# EAGLE board Tube_board_v2 (EAGLE 6.5.0)
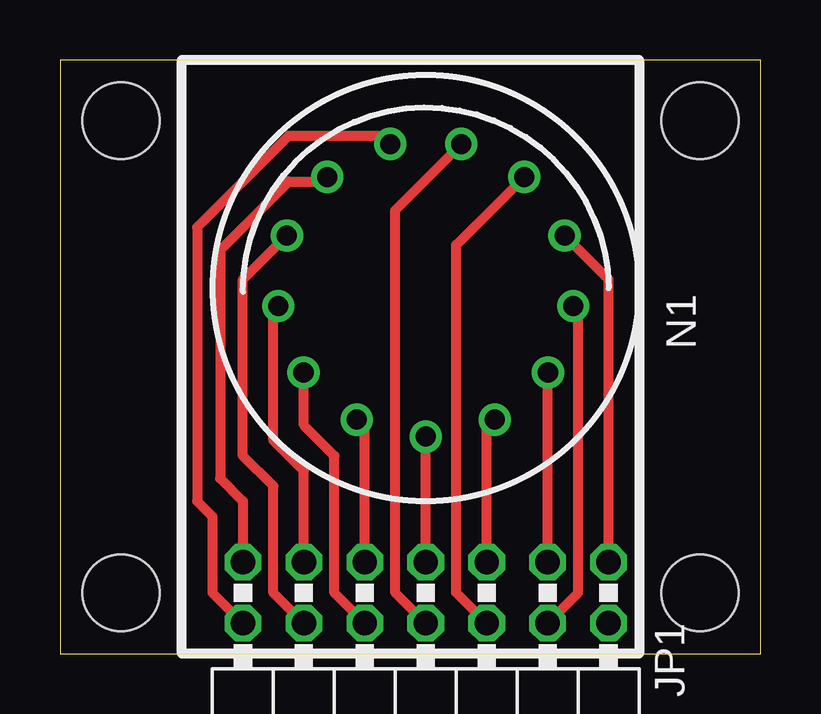
[diagram p0: board, top side]

Size 29.2 x 24.75 mm. Coordinates in mm from the lower left corner, seen from the top.
Outline: 0,0 29.2,0 29.2,24.75 0,24.75 0,0
Copper layers (1*16): Top 0.035mm / dielectric 1.5mm / Bottom 0.035mm
Design rules "default": minimum track width 10mil, minimum drill 24mil, track to track 8mil, track to pad 8mil, pad to pad 8mil, via to via 8mil, smd to smd 8mil, copper to edge 40mil, drill to drill 8mil, minimum pad ring 10mil, minimum via ring 8mil, stop-mask expansion 4mil, vias tented up to drill 0mil, thermal gap 10mil
Net classes: 0 default: width 0.051 mm, clearance 0.205 mm
Holes 3.2 mm at 2.54,2.54 2.54,22.23 26.67,22.23 26.67,2.54

## Footprints (pad centres in the part's own frame; a part is rotated, then mirrored left to right if it is on the bottom)
2X07/90 = drill 1.016 octagon: 1 -7.62,-6.35; 2 -7.62,-3.81; 3 -5.08,-6.35; 4 -5.08,-3.81; 5 -2.54,-6.35; 6 -2.54,-3.81; 7 0,-6.35; 8 0,-3.81; 9 2.54,-6.35; 10 2.54,-3.81; 11 5.08,-6.35; 12 5.08,-3.81; 13 7.62,-6.35; 14 7.62,-3.81
IN-14 = drill 0.84: 0 5.094,-3.516; 1 -5.094,-3.516; 2 -6.145,-0.746; 3 -5.788,2.195; 4 -4.105,4.633; 5 -1.481,6.01; 6 1.481,6.01; 7 4.105,4.633; 8 5.788,2.195; 9 6.145,-0.746; A 0,-6.19; LHDP 2.877,-5.481; RHDP -2.877,-5.481

## Placement (x,y rotation side)
JP1  [2X07/90]  15.24,-2.54 180 top
N1  IN-14  [IN-14]  15.24,15.24 0 top

## Library data of the parts
JP1 = pinhead
N1 = russian-nixies

## Nets
N$1: JP1.9 N1.RHDP
N$2: JP1.7 N1.A
N$3: JP1.10 N1.1
N$4: JP1.11 N1.2
N$5: JP1.12 N1.3
N$6: JP1.13 N1.4
N$7: JP1.14 N1.5
N$8: JP1.8 N1.6
N$9: JP1.6 N1.7
N$10: JP1.5 N1.LHDP
N$11: JP1.3 N1.0
N$13: JP1.4 N1.9
N$14: JP1.1 N1.8

## Tracks (layer width: path | path; a pad name or v marks a point on that pad's centre or on a via)
N$1
  Top 0.406: JP1.9 12.7,9.42 N1.RHDP
N$2
  Top 0.406: JP1.7 N1.A
N$3
  Top 0.406: JP1.10 11.43,2.54 11.43,8.26 10.16,9.53 N1.1
N$4
  Top 0.406: JP1.11 10.16,7.62 8.89,8.89 8.89,14.29 N1.2
N$5
  Top 0.406: JP1.12 8.89,2.54 8.89,6.99 7.62,8.26 7.62,15.6 N1.3
N$6
  Top 0.406: N1.4 10.95,19.68 9.53,19.68 6.67,16.83 6.67,7.3 7.62,6.35 JP1.13
N$7
  Top 0.406: N1.5 13.42,21.59 9.53,21.59 5.71,17.78 5.71,6.35 6.35,5.71 6.35,2.54 JP1.14
N$8
  Top 0.406: JP1.8 13.97,2.54 13.97,18.5 N1.6
N$9
  Top 0.406: JP1.6 16.51,2.54 16.51,17.04 N1.7
N$10
  Top 0.406: JP1.5 17.78,9.42 N1.LHDP
N$11
  Top 0.406: JP1.3 N1.0
N$13
  Top 0.406: JP1.4 21.59,2.54 21.59,14.29 N1.9
N$14
  Top 0.406: JP1.1 22.86,15.6 N1.8